# Altium PCB Power_Protection_Test_Board_(Large_Trace_Widths).PcbDoc
Units mm, origin at the board's own origin, x right, y up, seen from the top; angles counter-clockwise.
Board outline 23 x 15 mm, 2 copper layers (Top Layer, Bottom Layer); 9 components, 4 nets, 17 pads, 0 vias.
Unrouted connection lines stored in the file: 3.
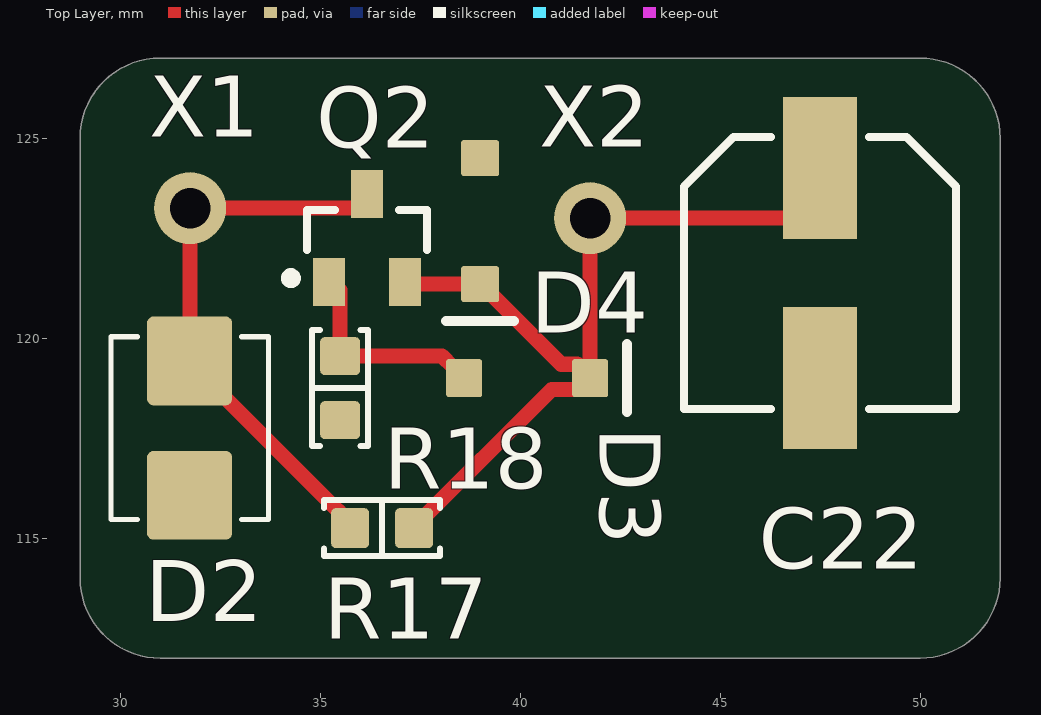
[diagram p0: Top Layer view]
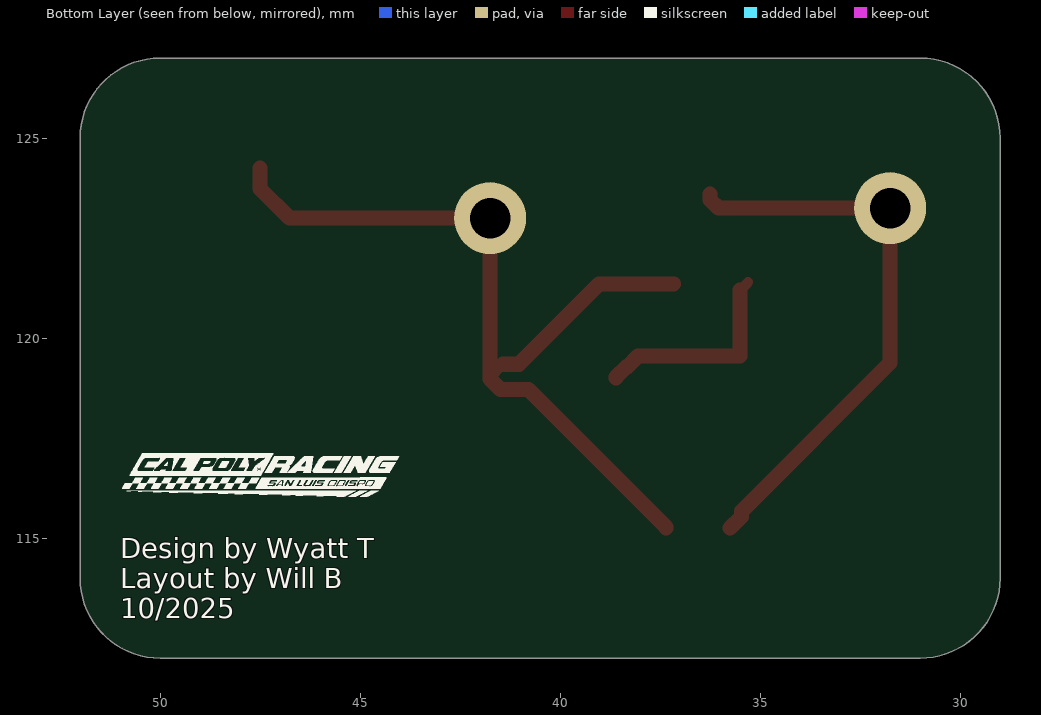
[diagram p1: Bottom Layer view, seen from below]

## Layer stack, top to bottom
Top Solder: solder mask 0.0102, Solder Resist, Dk 3.5
Top Layer: signal copper 0.0356
Dielectric 1: dielectric 0.32, FR-4, Dk 4.8
Bottom Layer: signal copper 0.0356
Bottom Solder: solder mask 0.0102, Solder Resist, Dk 3.5

## Board outline
31,112 cw(c31,114) 29,114 29,125 cw(c31,125) 31,127 50,127 cw(c50,125) 52,125 52,114 cw(c50,114) 50,112

## Design rules (kind name [scope] priority, off if disabled: settings)
Clearance [All] p1: gap=0.254 ignorepadtopadclearanceinfootprint=FALSE
PolygonConnect [All] p1: connectstyle=Relief reliefconductorwidth=0.254 reliefentries=4 polygonreliefangle="90 Angle" airgapwidth=0.254
RoutingVias [All] p1: holewidth=0.711 width=1.27 viastyle="Through Hole" minholewidth=0.711 minwidth=1.27 maxholewidth=0.711 maxwidth=1.27
SolderMaskExpansion [All] p1: expansion=0.102 istentingtop=FALSE
SupplyNets "Schematic Supply Nets" [InNet('GND')] p1: voltage=0.000
Width [All] p1: maxlimit=0.381 minlimit=0.254 preferedwidth=0.254
30 further rules are at their usual default settings.

## Components (designator, comment, footprint, x,y, rotation, side; value= is the part's Value field where it differs from the comment)
C22 "865080343009" 6.60x6.60x8.00mm_E_CAP 47.5,121.625 r270 top value=100u
D2 "SMBJ13CA-E3/52" SMBJ13CA-E3/52 31.737,117.75 r90 top
D3 "MMSZ5231B-7-F" SOD-123 40.175,119 r180 top
D4 "MMSZ5231B-7-F" SOD-123 39,122.925 r90 top
Q2 "MOSFET P-CH 30V 2A SOT-23" SOT23-3 36.169,122.5 r90 top
R17 "Resistor" 0603_RES 36.55,115.25 r0 top value=DNP
R18 "Resistor" 0603_RES 35.5,118.75 r90 top value=1M
X1 "GenericPinHeader(0.1in)" GenericPinHeader(.1in) 31.75,123.25 r0 top
X2 "GenericPinHeader(0.1in)" GenericPinHeader(.1in) 41.75,123 r0 top

## Footprints (in the part's own frame and the unit in brackets; to place one, negate y for a bottom-side part, rotate by r counter-clockwise, add the part's x,y. Pads: shape width x height; smd on the part's side, far side on the other; paste and mask are expansions set on the pad)
6.60x6.60x8.00mm_E_CAP [mm] "Aluminum Electrolytic Capacitor, Body 6.60x6.60x8.00mm, IPC Low Density"
  rect 3.55x1.85 smd: 1(-2.625,0) 2(2.625,0)
  silkscreen extent -3.4,-3.4 3.4,3.4, body extent -3.2,-3.4 3.8,3.4, height 8
0603_RES [mm] "Chip Resistor, 2-Leads, Body 1.60x0.80mm, IPC Medium Density"
  rrect25% 0.95x1 smd: 1(-0.8,0) 2(0.8,0)
  silkscreen extent -1.45,-0.7 1.45,0.7, body extent -0.8,-0.4 0.8,0.4, height 0.45
GenericPinHeader(.1in) [mm] "Generic .1in (2.54mm) pin header"
  round 1.8 hole 1.016: 1(0,0)
  body extent -1.27,-1.27 1.27,1.27, height 9.5
SMBJ13CA-E3/52 [mm]
  rrect15% 2.22x2.13 smd: 1(-1.68,0) 2(1.68,0)
  silkscreen extent -2.28,-1.97 2.28,1.97, body extent -2.7,-1.81 2.7,1.81, height 2.44
SOD-123 [mm] "SODFL, 2-Leads, Body 1.55x3.70mm, IPC Medium Density"
  rrect15% 0.9x0.95 smd: 1(-1.575,0) 2(1.575,0)
  silkscreen extent -2.5,-0.85 -2.5,0.85, body extent -1.85,-0.85 1.85,0.85, height 1.35
SOT23-3 [mm] "SOT23, 3-Leads, Body 2.92x2.37mm, Pitch 0.95mm, IPC Medium Density, NUP2105L"
  rect 1.2x0.8 smd: 1(-1.1,0.95) 2(-1.1,-0.95) 3(1.1,0)
  silkscreen extent -1.12,-1.5 0.7,2.02, body extent -1.5,-1.5 1.5,1.5, height 1.25

## Part data
C22: "CAP ALUM 100UF 20% 16V SMD", Percent Tolerance=20, ComponentLink1Description=Digikey, ComponentLink1URL=https://www.digikey.com/en/products/detail/w%C3%BCrth-elektronik/865080343009/5728014
D2: "21.5V Clamp 27.9A Ipp Tvs Diode Surface Mount DO-214AA (SMBJ). Bidirectional", Package=DO-214AA, ComponentLink1Description=Digikey, ComponentLink1URL=https://www.digikey.com/en/products/detail/vishay-general-semiconductor-diodes-division/SMBJ13CA-E3-52/1119222?s=N4IgTCBcDaIMoFkBCApAjAZgMIEEC0AohgPQCsEAugL5A, Vr=13V
D3 D4: "Zener Diode 5.1V 500mW ±5% Surface Mount SOD-123", Package=SOD-123, ComponentLink1Description=Digikey, ComponentLink1URL=https://www.digikey.com/en/products/detail/diodes-incorporated/MMSZ5231B-7-F/755472, Num_Circuits=1
Q2: library part STR2P3LLH6, "P-Channel 2A (Ta) 350mW (Tc) Surface Mount SOT-23", Current=2, Package=SOT-23, ComponentLink1Description=Digikey, ComponentLink1URL=https://www.digikey.com/en/products/detail/stmicroelectronics/STR2P3LLH6/5244876, ComponentLink2Description=Datasheet, ComponentLink2URL=https://www.st.com/content/ccc/resource/technical/document/datasheet/96/4a/55/9d/3c/16/47/d6/DM00084050.pdf/files/DM00084050.pdf/jcr:content/translations/en.DM00084050.pdf, Num_Circuits=1, RdsOn=56, Type="P Channel", VdsMax=30, VgsMax=20, Vt=10
X1 X2: "Generic .1in(2.54mm) pitch pin header"

## Nets (pads, with @x,y where several pads share a name; then routed paths per layer and width w, separated by ;. In a path a pad name is that pad's centre, name@x,y a point inside that pad or via, vN(x,y) a via of type N, cw(c..) or ccw(c..) an arc to the next point about the centre after c; other vN are vias at no path point)
GND: C22.2 D2.1 D4.2 R18.1
NetC22_1: C22.1 D3.1 D4.1 Q2.2 R17.2 X2.1 | length 22.2
  Top Layer w0.254: Q2.2 Q2.2@37.169,121.35 ; D4.1 D4.1@39.025,121.35 ; D3.1@41.427,119.348 41.75,119.025 D3.1
  Top Layer w0.381: Q2.2@37.169,121.35 D4.1 ; R17.2 37.35,115.275 40.791,118.716 41.49,118.716 41.75,118.975 D3.1 X2.1 46.765,123 47.5,123.734 C22.1 ; D4.1@39.025,121.35 41.027,119.348 D3.1@41.427,119.348
NetD2_2: D2.2 Q2.3 R17.1 X1.1 | length 14.4
  Top Layer w0.381: R17.1 35.465,115.535 35.465,115.67 31.75,119.385 31.75,119.43 X1.1 36.04,123.25 36.25,123.46 Q2.3@36.25,123.6
NetD3_2: D3.2 Q2.1 R18.2 | length 5.3
  Top Layer w0.254: Q2.1@35.3,121.4 Q2.1@35.5,121.2
  Top Layer w0.381: Q2.1@35.5,121.2 R18.2 38.05,119.55 38.316,119.285 38.34,119.285 38.6,119.025 D3.2

## Silkscreen, mask and mechanical layers (free items; w line width, h text height)
Bottom Overlay:
  drawing of 32 lines, arcs and shapes, not listed
  text "Design by Wyatt T / Layout by Will B / 10/2025" at 51,113 h0.5